# EAGLE board inputsheild (EAGLE 9.3.0)
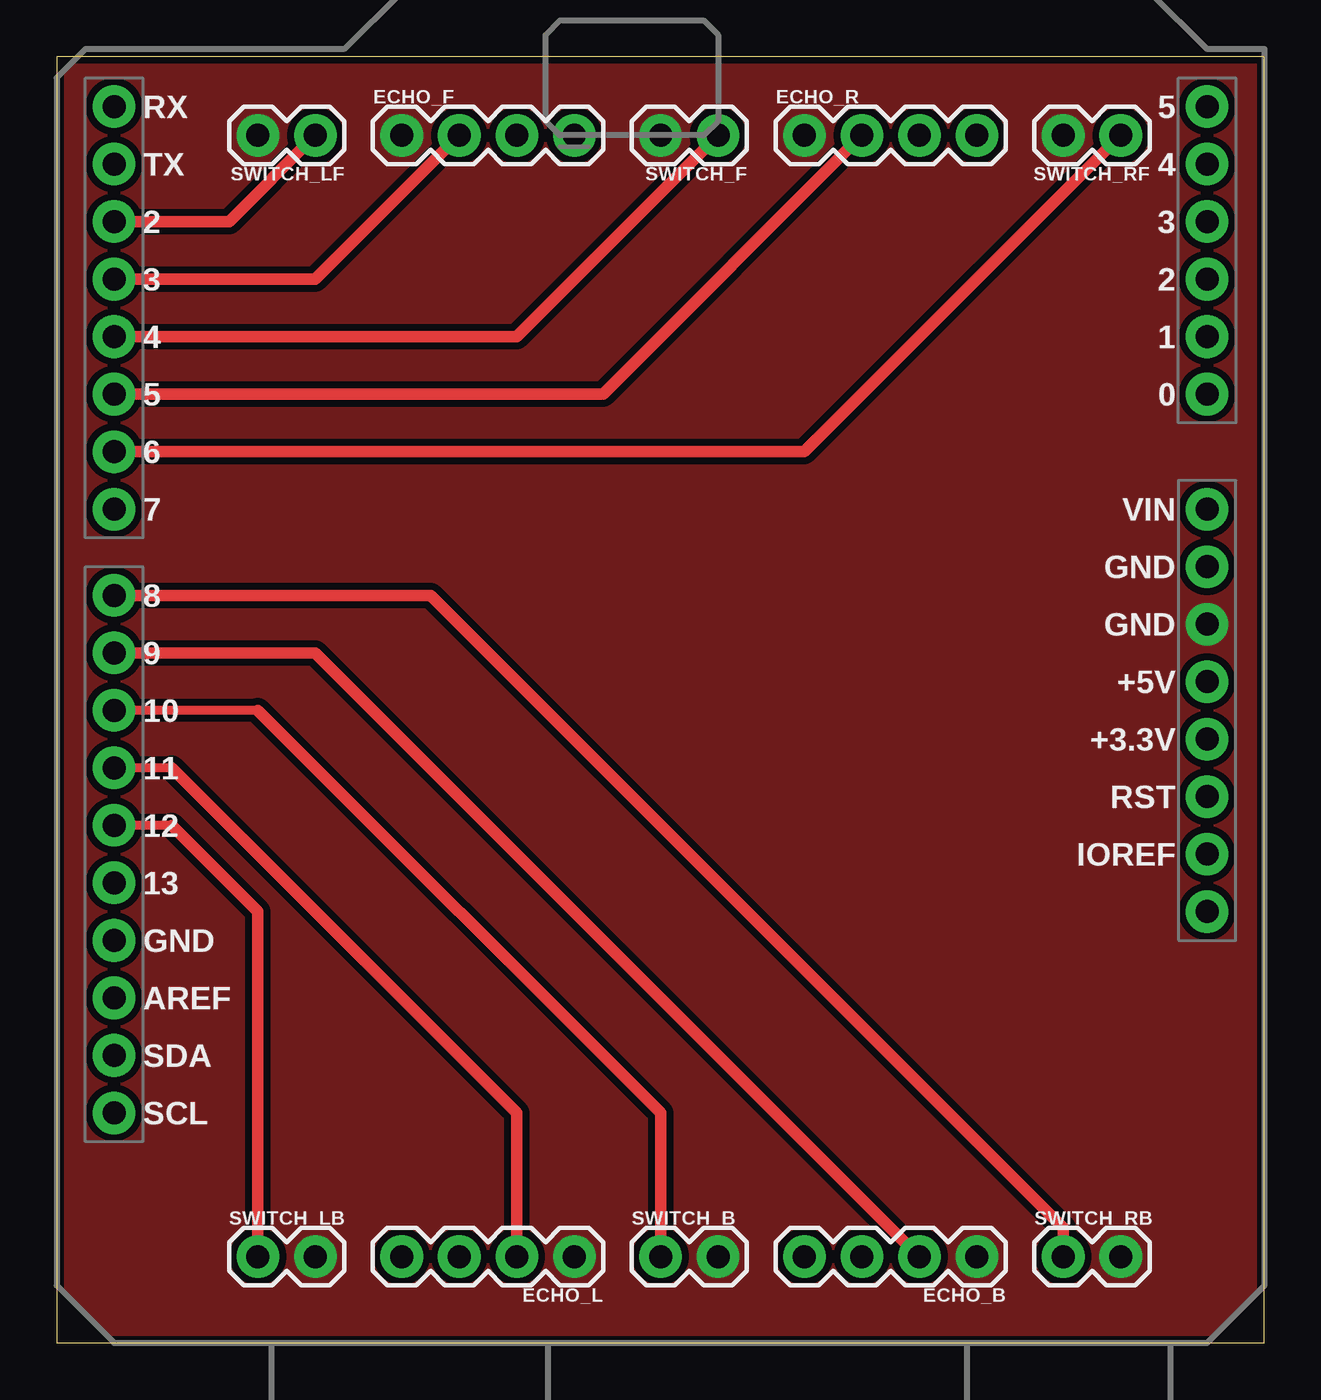
[diagram p0: board, top side]
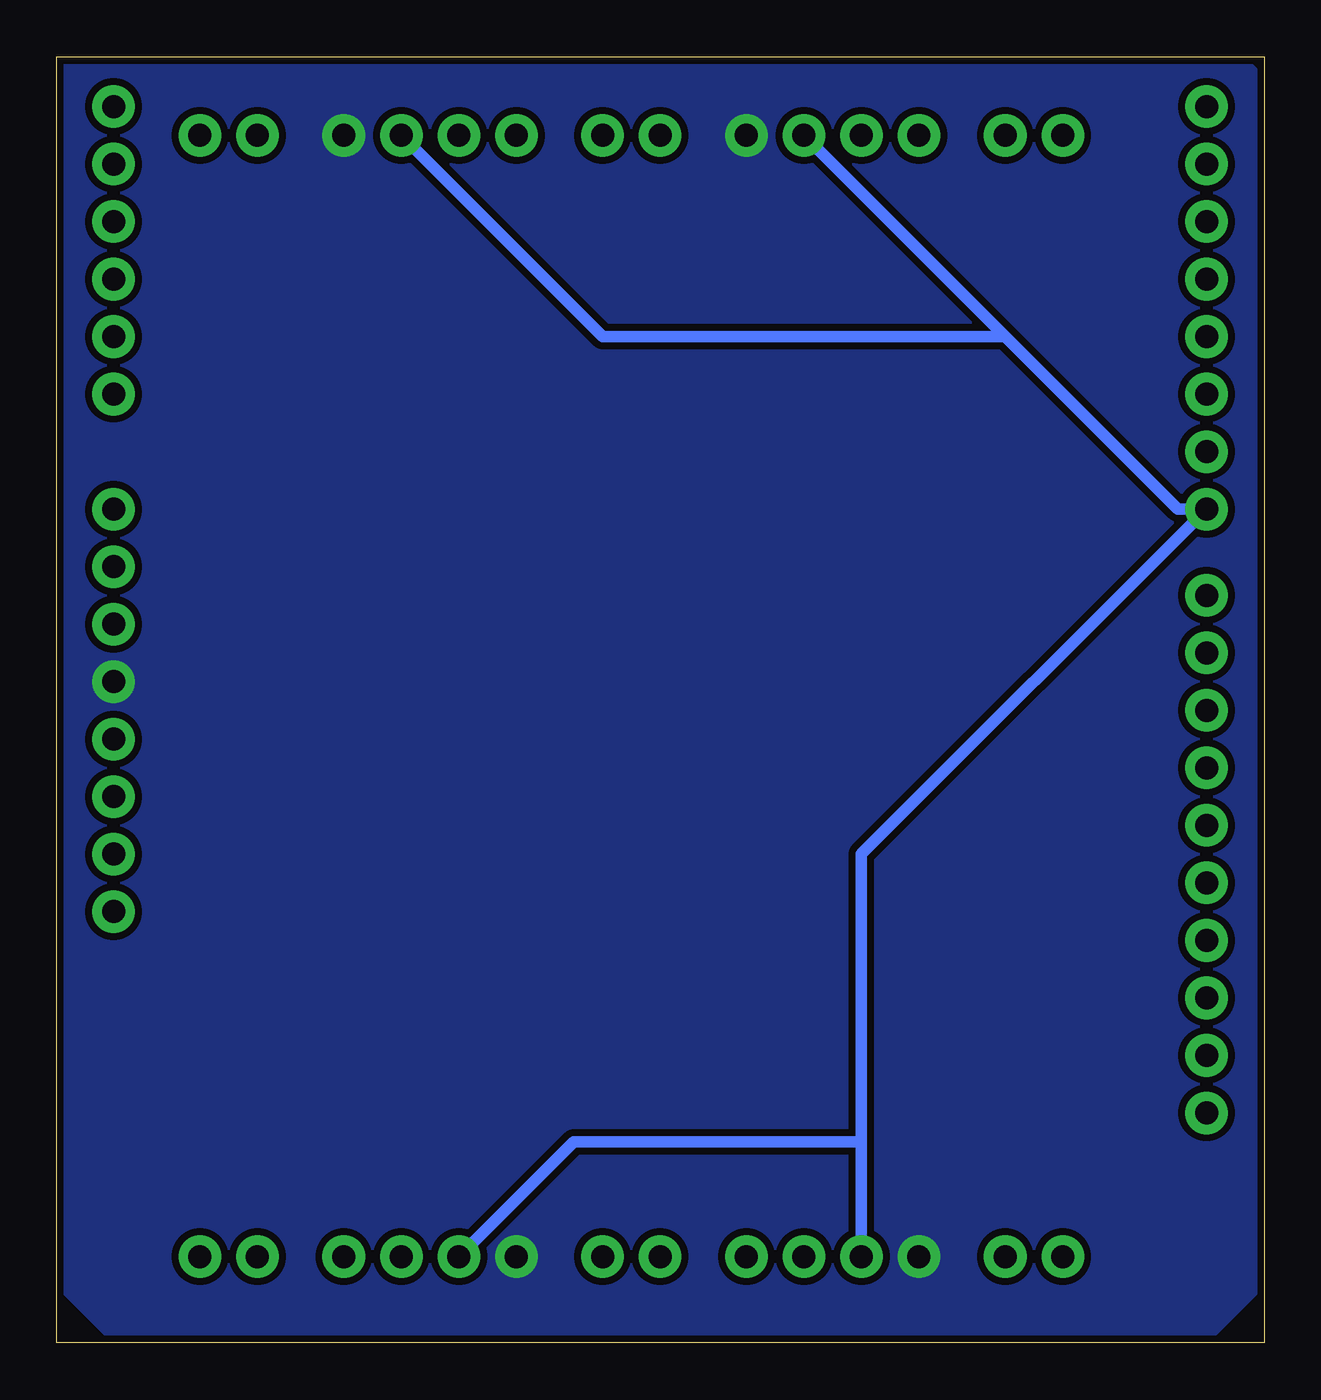
[diagram p1: board, bottom side, seen from below]

Size 53.32 x 56.82 mm. Coordinates in mm from the lower left corner, seen from the top.
Outline: 0,0 53.32,0 53.32,56.82 0,56.82 0,0
Copper layers (1*16): Top 0.035mm / dielectric 1.5mm / Bottom 0.035mm
Design rules "default *": minimum track width 6mil, minimum drill 0.35mm, track to track 6mil, track to pad 6mil, pad to pad 6mil, via to via 6mil, smd to smd 6mil, copper to edge 10mil, drill to drill 6mil, minimum pad ring 10mil, minimum via ring 8mil, stop-mask expansion 4mil, vias tented up to drill 0mil, thermal gap 10mil

## Footprints (pad centres in the part's own frame; a part is rotated, then mirrored left to right if it is on the bottom)
UNO_R3_SHIELD = drill 1.016 pad 1.88: 3.3V 24.13,-2.54; 5V 24.13,0; A0 24.13,12.7; A1 24.13,15.24; A2 24.13,17.78; A3 24.13,20.32; A4 24.13,22.86; A5 24.13,25.4; AREF -24.13,-13.97; D2 -24.13,20.32; D3 -24.13,17.78; D4 -24.13,15.24; D5 -24.13,12.7; D6 -24.13,10.16; D7 -24.13,7.62; D8 -24.13,3.81; D9 -24.13,1.27; D10 -24.13,-1.27; D11 -24.13,-3.81; D12 -24.13,-6.35; D13 -24.13,-8.89; GND@0 24.13,2.54; GND@1 24.13,5.08; GND@2 -24.13,-11.43; IOREF 24.13,-7.62; NC 24.13,-10.16; RES 24.13,-5.08; RX -24.13,25.4; SCL -24.13,-19.05; SDA -24.13,-16.51; TX -24.13,22.86; VIN 24.13,7.62
1X04 = drill 1.016 pad 1.88: 1 0,0; 2 2.54,0; 3 5.08,0; 4 7.62,0
1X02 = drill 1.016 pad 1.88: 1 0,0; 2 2.54,0

## Placement (x,y rotation side)
B1  ARDUINO_UNO_R3_SHIELDBASIC  [UNO_R3_SHIELD]  26.67,29.21 0 top
ECHO_B  [1X04]  40.64,3.81 180 top
ECHO_F  [1X04]  15.24,53.34 0 top
ECHO_L  [1X04]  22.86,3.81 180 top
ECHO_R  [1X04]  33.02,53.34 0 top
SWITCH_B  [1X02]  26.67,3.81 0 top
SWITCH_F  [1X02]  29.21,53.34 180 top
SWITCH_LB  [1X02]  8.89,3.81 0 top
SWITCH_LF  [1X02]  11.43,53.34 180 top
SWITCH_RB  [1X02]  44.45,3.81 0 top
SWITCH_RF  [1X02]  46.99,53.34 180 top

## Library data of the parts
B1 = SparkFun-Boards
ECHO_B ECHO_F ECHO_L ECHO_R = SparkFun-Connectors; PROD_ID: CONN-09696
SWITCH_B SWITCH_F SWITCH_LB SWITCH_LF SWITCH_RB SWITCH_RF = SparkFun-Connectors

## Nets
+5V: B1.5V ECHO_B.4 ECHO_F.4 ECHO_L.4 ECHO_R.4
D2: B1.D2 SWITCH_LF.1
D3: B1.D3 ECHO_F.2
D4: B1.D4 SWITCH_F.1
D5: B1.D5 ECHO_R.2
D6: B1.D6 SWITCH_RF.1
D8: B1.D8 SWITCH_RB.1
D9: B1.D9 ECHO_B.2
D10: B1.D10 SWITCH_B.1
D11: B1.D11 ECHO_L.2
D12: B1.D12 SWITCH_LB.1
GND: B1.GND@0 ECHO_B.1 ECHO_F.1 ECHO_L.1 ECHO_R.1 SWITCH_B.2 SWITCH_F.2 SWITCH_LB.2 SWITCH_LF.2 SWITCH_RB.2 SWITCH_RF.2
TRIG: B1.D7 ECHO_B.3 ECHO_F.3 ECHO_L.3 ECHO_R.3

## Tracks (layer width: path | path; a pad name or v marks a point on that pad's centre or on a via)
+5V
  pour Bottom (isolate 0.305, no thermals): 0,55.88 1.27,57.15 12.7,57.15 15.24,59.69 48.26,59.69 50.8,57.15 53.34,57.15 53.34,2.54 50.8,0 2.54,0 0,2.54
D2
  Top 0.508: SWITCH_LF.1 7.62,49.53 B1.D2
D3
  Top 0.508: ECHO_F.2 11.43,46.99 B1.D3
D4
  Top 0.508: SWITCH_F.1 20.32,44.45 B1.D4
D5
  Top 0.508: ECHO_R.2 24.13,41.91 B1.D5
D6
  Top 0.508: SWITCH_RF.1 33.02,39.37 B1.D6
D8
  Top 0.508: SWITCH_RB.1 44.45,5.08 16.51,33.02 B1.D8
D9
  Top 0.508: ECHO_B.2 11.43,30.48 B1.D9
D10
  Top 0.406: 8.89,27.94 B1.D10
  Top 0.508: SWITCH_B.1 26.67,10.16 8.89,27.94
D11
  Top 0.406: 5.08,25.4 B1.D11
  Top 0.508: ECHO_L.2 20.32,10.16 5.08,25.4
D12
  Top 0.406: 5.08,22.86 B1.D12
  Top 0.508: SWITCH_LB.1 8.89,19.05 5.08,22.86
GND
  pour Top (isolate 0.305, no thermals): 0,55.88 1.27,57.15 12.7,57.15 15.24,59.69 48.26,59.69 50.8,57.15 53.34,57.15 53.34,2.54 50.8,0 2.54,0 0,2.54
TRIG
  Bottom 0.152: 17.78,8.89 ECHO_L.3
  Bottom 0.508: ECHO_B.3 30.48,8.89 17.78,8.89 | ECHO_L.3 17.78,21.59 B1.D7 3.81,36.83 11.43,44.45 | ECHO_F.3 11.43,44.45 | ECHO_R.3 29.21,44.45 11.43,44.45